# Altium PCB WikiTFT-2.0.PcbDoc
Units mil, origin at the board's own origin, x right, y up, seen from the top; angles counter-clockwise.
Board outline 1975 x 1975 mil, 2 copper layers (Top Layer, Bottom Layer); 8 components, 28 nets, 126 pads, 69 vias.
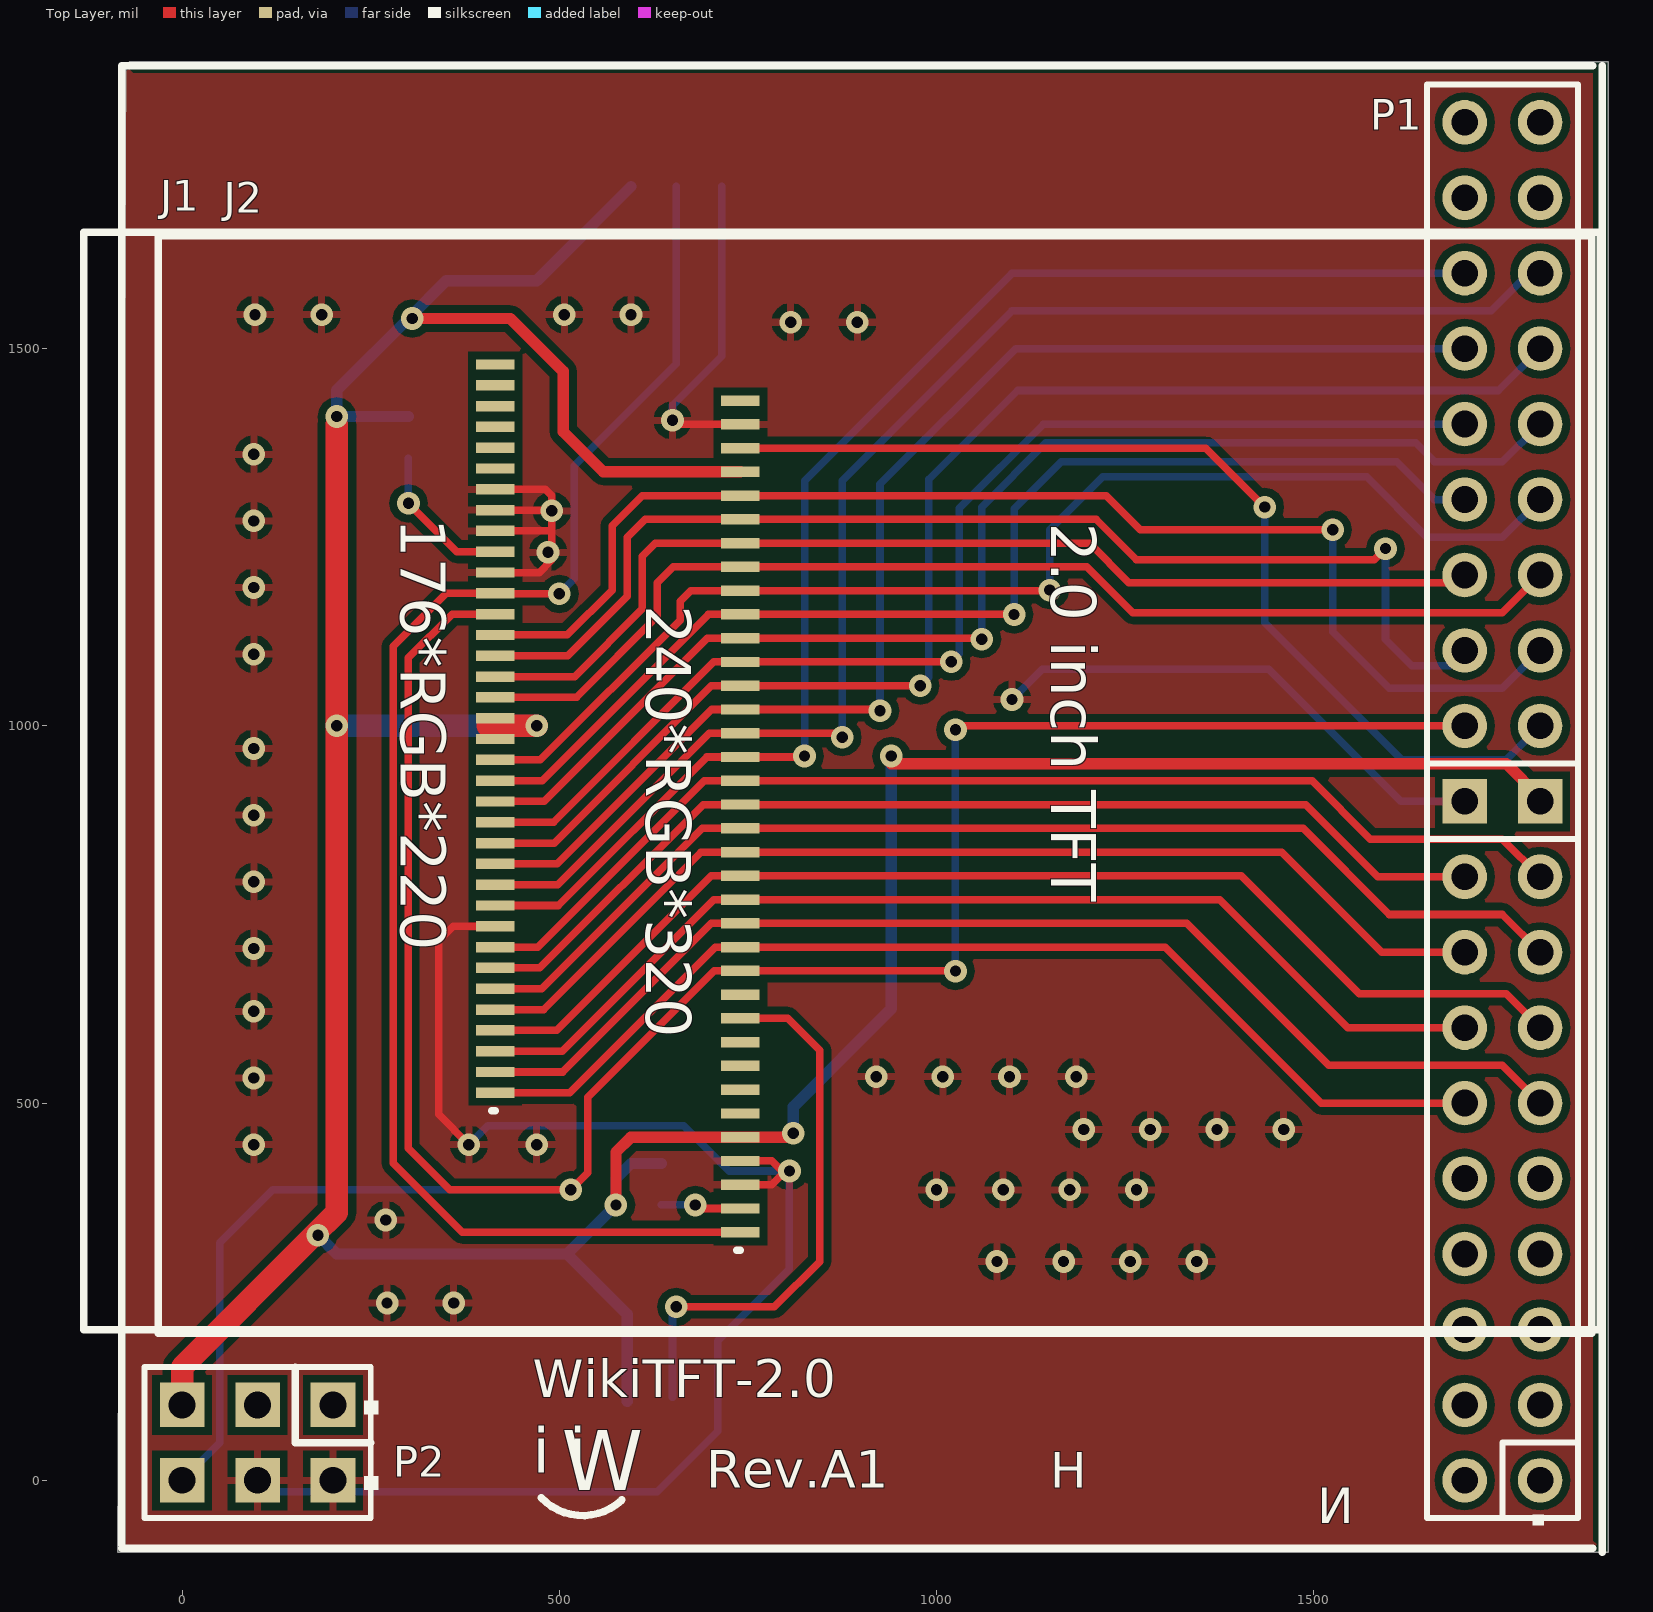
[diagram p0: Top Layer view]
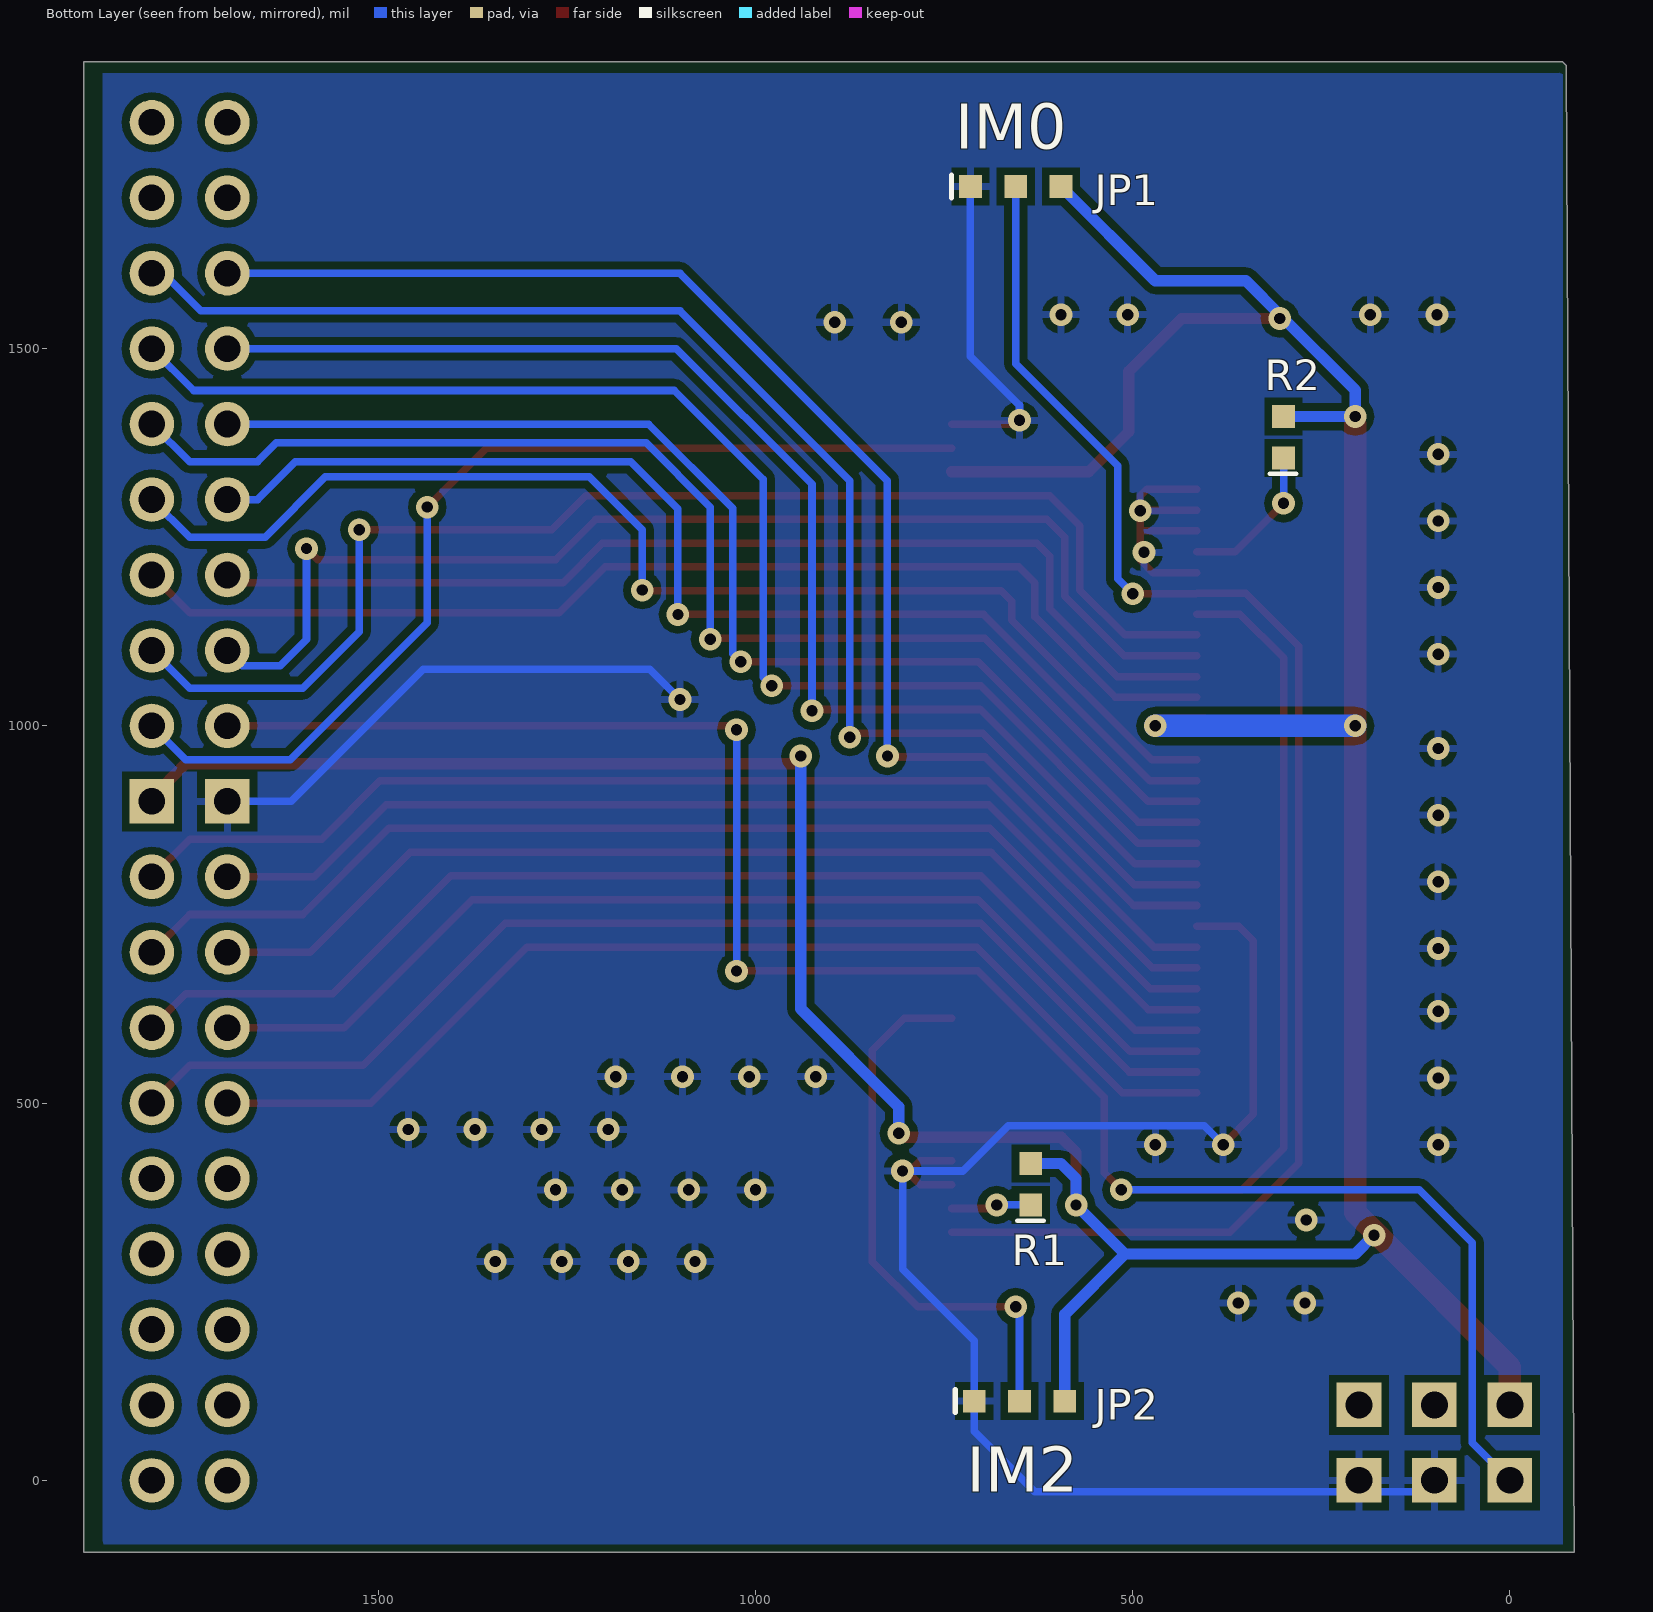
[diagram p1: Bottom Layer view, seen from below]

## Layer stack, top to bottom
Top Solder: solder mask 0.4, Solder Resist, Dk 3.5
Top Layer: signal copper 1.4
Dielectric 1: dielectric 12.6, FR-4, Dk 4.8
Bottom Layer: signal copper 1.4
Bottom Solder: solder mask 0.4, Solder Resist, Dk 3.5

## Board outline
-75,1875 -70,1880 1890,1880 1890,-95 -85,-95

## Design rules (kind name [scope] priority, off if disabled: settings)
Clearance [All] p1: gap=10
PolygonConnect [All] p1: connectstyle=Relief reliefconductorwidth=10 reliefentries=4 polygonreliefangle="90 Angle" airgapwidth=10
RoomDefinition WikiTFT-2.0 [InComponentClass('WikiTFT-2.0')] p1: confinementstyle=ConfineIn formatcopy=TRUE lockcomponents=FALSE outline -85,-95 1920,-95 1920,1890 -85,1890
RoutingVias [All] p1: holewidth=15 width=30 viastyle="Through Hole" minholewidth=10 minwidth=10 maxholewidth=30 maxwidth=50
SolderMaskExpansion [All] p1: expansion=4
UnpouredPolygon [All] p1: allowunpoured=FALSE
Width [All] p1: maxlimit=30 minlimit=10 preferedwidth=10
29 further rules are at their usual default settings.

## Components (designator, comment, footprint, x,y, rotation, side; value= is the part's Value field where it differs from the comment)
J1 "TFT-2.0-240x320-HX8367-A" TFT-2.0-HX8637 740,880 r270 top
J2 "TFT-2.0-178x220-LGDP4525" TFT-2.0-LGDP4525 415,420 r270 top
JP1 "Jumper3" JUMPER3_SMD 685,1715 r180 bottom
JP2 "Jumper3" JUMPER3_SMD 680,105 r180 bottom
P1 "WIKIGPIO-FULL" WIKIGPIO-FULL 1800,0 r90 top
P2 "WIKIPWR" WIKIPWR 200,100 r180 top
R1 "NA" 0603M 635,365 r90 bottom
R2 "NA" 0603M 300,1355 r90 bottom

## Footprints (in the part's own frame and the unit in brackets; to place one, negate y for a bottom-side part, rotate by r counter-clockwise, add the part's x,y. Pads: shape width x height; smd on the part's side, far side on the other; paste and mask are expansions set on the pad)
0603M [mil]
  rect 30x30 smd: 1(0,0) 2(55,0)
  silkscreen extent -21,-17 -21,18, body extent -5,-15 60,15, height 43
JUMPER3_SMD [mil]
  rect 30x30 smd: 1(-30,0) 2(30,0) 3(90,0)
  silkscreen extent -55,-15 -55,15
TFT-2.0-HX8637 [mm]
  rect 0.35x1.3 smd: 1(14,0) 2(13.2,0) 3(12.4,0) 4(11.6,0) 5(10.8,0) 6(10,0) 7(9.2,0) 8(8.4,0) 9(7.6,0) 10(6.8,0) 11(6,0) 12(5.2,0) 13(4.4,0) 14(3.6,0) 15(2.8,0) 16(2,0) 17(1.2,0) 18(0.4,0) 19(-0.4,0) 20(-1.2,0) 21(-2,0) 22(-2.8,0) 23(-3.6,0) 24(-4.4,0) 25(-5.2,0) 26(-6,0) 27(-6.8,0) 28(-7.6,0) 29(-8.4,0) 30(-9.2,0) 31(-10,0) 32(-10.8,0) 33(-11.6,0) 34(-12.4,0) 35(-13.2,0) 36(-14,0)
  silkscreen extent -19.56,-19.6 17.4,28.66
TFT-2.0-LGDP4525 [mm]
  rect 0.35x1.3 smd: 1(-2.38,0.004) 2(-3.08,0.004) 3(-3.781,0.004) 4(-4.481,0.004) 5(-5.182,0.004) 6(-5.883,0.004) 7(-6.583,0.004) 8(-7.284,0.004) 9(-7.984,0.004) 10(-8.685,0.004) 11(-9.385,0.004) 12(-10.086,0.004) 13(-10.787,0.004) 14(-11.487,0.004) 15(-12.188,0.004) 16(-12.888,0.004) 17(-13.589,0.004) 18(-14.29,0.004) 19(-14.99,0.004) 20(-15.691,0.004) 21(-16.391,0.004) 22(-17.092,0.004) 23(-17.792,0.004) 24(-18.493,0.004) 25(-19.194,0.004) 26(-19.894,0.004) 27(-20.595,0.004) 28(-21.295,0.004) 29(-21.996,0.004) 30(-22.697,0.004) 31(-23.397,0.004) 32(-24.098,0.004) 33(-24.798,0.004) 34(-25.499,0.004) 35(-26.199,0.004) 36(-26.9,0.004)
  silkscreen extent -31.35,-13.85 5.61,37.21
WIKIGPIO-FULL [mm] "Connector; Header; 19x2 Position"
  round 1.5 hole 0.9: 1(0,0) 2(0,2.54) 3(2.54,0) 4(2.54,2.54) 5(5.08,0) 6(5.08,2.54) 7(7.62,0) 8(7.62,2.54) 9(10.16,0) 10(10.16,2.54) 11(12.7,0) 12(12.7,2.54) 13(15.24,0) 14(15.24,2.54) 15(17.78,0) 16(17.78,2.54) 17(20.32,0) 18(20.32,2.54) 21(25.4,0) 22(25.4,2.54) 23(27.94,0) 24(27.94,2.54) 25(30.48,0) 26(30.48,2.54) 27(33.02,0) 28(33.02,2.54) 29(35.56,0) 30(35.56,2.54) 31(38.1,0) 32(38.1,2.54) 33(40.64,0) 34(40.64,2.54) 35(43.18,0) 36(43.18,2.54) 37(45.72,0) 38(45.72,2.54)
  rect 1.5x1.5 hole 0.9: 19(22.86,0) 20(22.86,2.54)
  silkscreen extent -1.52,-1.27 46.99,3.81
WIKIPWR [mm] "Connector; Header; 3x2 Position"
  rect 1.5x1.5 hole 0.9: 1(0,0) 2(0,2.54) 3(2.54,0) 4(2.54,2.54) 5(5.08,0) 6(5.08,2.54)
  silkscreen extent -1.52,-1.27 6.35,3.81

## Part data
J2: "LGDP4525-178x220"
P1: "Header, 19-Pin, Dual row"
P2: "PWR HDR"
R1 R2: library part Res, "Resistor"

## Via types
v1: diameter 30, hole 15, Top Layer to Bottom Layer, 69 vias

## Nets (pads, with @x,y where several pads share a name; then routed paths per layer and width w, separated by ;. In a path a pad name is that pad's centre, name@x,y a point inside that pad or via, vN(x,y) a via of type N, cw(c..) or ccw(c..) an arc to the next point about the centre after c; other vN are vias at no path point)
GND: J1.3 J1.4 J1.35 J2.9 J2.26 J2.28 J2.29 J2.30 JP1.1 JP2.1 P1.20 P2.2 P2.4 | length 3526.1
  Top Layer w10: v1(380,445) 340,485 340,715 359.34,734.34 J2.9 ; J2.26 473.24,1203.24 490,1220 490,1260 ; J2.28 488.4,1258.4 490,1260 ; J2.29 v1@490,1285.98 ; J2.30 481.44,1313.56 490,1305 v1@490,1285.98 ; v1(650,1405) 655.32,1399.68 J1.35 ; J1.3 781.81,391.81 v1@797.5,407.5 ; J1.4 781.69,423.31 v1@797.5,407.5 ; v1(805,410) 805,400 v1@797.5,407.5 ; 490,1260 v1@490,1285.98
  Bottom Layer w10: P2.4 115,-15 630,-15 710,65 JP2.1 710,185 805,280 v1(805,410) 725,410 665,470 405,470 v1(380,445) ; v1(650,1405) 650,1425 715,1490 JP1.1 ; v1(1100,1035) 1140,1075 1440,1075 1615,900 P1.20
  other v1: 271.67,235 360,235 1080,290 1168.33,290 1256.67,290 1345,290 270,345 1000,385 1088.33,385 1176.67,385 1265,385 95,445 470,445 1195,465 1283.33,465 1371.67,465 1460,465 95,533.33 920,535 1008.33,535 1096.67,535 1185,535 95,621.67 95,705 95,793.33 95,881.67 95,970 95,1095 95,1183.33 485,1230 95,1271.67 490,1285 95,1360 806.67,1535 895,1535 96.67,1545 185,1545 506.67,1545 595,1545
IM0: J1.1 J2.25 JP1.2 | length 2036.9
  Top Layer w10: v1(500,1175) 415.79,1175 J2.25 350,1175.65 280,1105.65 280,420 371.18,328.82 J1.1
  Bottom Layer w10: v1(500,1175) 520,1195 520,1345 655,1480 JP1.2
IM2: J1.10 JP2.2 | length 739.4
  Top Layer w10: v1(655,230) 785,230 845,290 845,570 802.72,612.28 J1.10
  Bottom Layer w10: JP2.2@650,110 650,225 v1(655,230)
NetJ1_2: J1.2 R1.1 | length 106.9
  Top Layer w10: v1(680.32,365) 685,360.32 J1.2
  Bottom Layer w10: R1.1 v1(680.32,365)
NetJ2_27: J2.27 R2.1 | length 201.7
  Top Layer w10: v1(300,1295) 364.18,1230.82 J2.27
  Bottom Layer w10: v1(300,1295) R2.1
PDVDD: J1.5 J1.33 J2.18 J2.19 JP1.3 JP2.3 P1.19 P2.5 R1.2 R2.2 | length 5447.9
  Top Layer w15: v1@175,325 v1(180,325) ; v1(305,1540) 435,1540 505,1470 505,1390 558.31,1336.69 J1.33 ; v1(575,365) 575,435 594.8,454.8 J1.5 804.8,454.8 v1(810,460) ; v1(940,960) 940,950 1755,950 1800,905 P1.19
  Top Layer w30: P2.5 0,150 175,325 205,355 v1(205,1000) v1@205,1400 ; 405,1000 v1(470,1000)
  Bottom Layer w15: v1(180,325) 205,300 510,300 ; R2.2 v1(205,1410) 205,1445 v1@302.5,1542.5 ; v1(305,1540) v1@302.5,1542.5 ; JP2.3 590,220 510,300 ; JP1.3 470,1590 350,1590 v1@302.5,1542.5 ; R1.2 595,420 575,400 v1(575,365) 510,300 ; v1(810,460) 810,495 940,625 v1(940,960)
  Bottom Layer w30: v1(205,1000) v1(470,1000)
TFT_CS: J1.32 J2.23 P1.23 | length 1740.8
  Top Layer w10: J2.23 510.49,1120.49 570,1180 570,1265 610.2,1305.2 J1.32 1224.8,1305.2 1270,1260 1515,1260 1525,1270 v1(1525,1260)
  Bottom Layer w10: v1@1525,1270 1525,1125 1600,1050 1750,1050 P1.23
TFT_DA00: J1.20 J2.8 P1.17 | length 1528.9
  Top Layer w10: J2.8 471.61,706.76 692.1,927.24 J1.20 1497.76,927.24 1575,850 1750,850 P1.17
TFT_DA01: J1.19 J2.7 P1.18 | length 1414.2
  Top Layer w10: J2.7 474.18,679.18 690.75,895.75 J1.19 1489.25,895.75 1585,800 P1.18
TFT_DA02: J1.18 J2.6 P1.15 | length 1541
  Top Layer w10: J2.6 476.6,651.6 689.25,864.25 J1.18 1485.75,864.25 1600,750 1750,750 P1.15
TFT_DA03: J1.17 J2.5 P1.16 | length 1426.3
  Top Layer w10: J2.5 479.01,624.01 687.76,832.76 J1.17 1457.24,832.76 1590,700 P1.16
TFT_DA04: J1.16 J2.4 P1.13 | length 1553.1
  Top Layer w10: J2.4 496.43,596.43 701.26,801.26 J1.16 1403.74,801.26 1560,645 1755,645 P1.13
TFT_DA05: J1.15 J2.3 P1.14 | length 1438.4
  Top Layer w10: J2.3 503.85,568.85 704.76,769.76 J1.15 1375.24,769.76 1545,600 P1.14
TFT_DA06: J1.14 J2.2 P1.11 | length 1565.2
  Top Layer w10: J2.2 504.55,541.27 701.55,738.27 J1.14 1331.73,738.27 1520,550 1750,550 P1.11
TFT_DA07: J1.13 J2.1 P1.12 | length 1450.5
  Top Layer w10: J2.1 513.69,513.69 706.77,706.77 J1.13 1303.23,706.77 1510,500 P1.12
TFT_DB00: J1.28 J2.17 P1.27 | length 1655.5
  Top Layer w10: J2.17 475,955 660,1140 660,1165 674.21,1179.21 J1.28 1149.21,1179.21 v1(1150,1180)
  Bottom Layer w10: v1(1150,1180) 1150,1260 1220,1330 1570,1330 1650,1250 1750,1250 P1.27
TFT_DB01: J1.27 J2.16 P1.28 | length 1562.6
  Top Layer w10: J2.16 477.42,927.42 697.72,1147.72 J1.27 v1(1102.72,1147.72)
  Bottom Layer w10: v1(1102.72,1147.72) 1102.72,1287.72 1165,1350 1610,1350 1660,1300 P1.28
TFT_DB02: J1.26 J2.15 P1.29 | length 1716.3
  Top Layer w10: J2.15 479.83,899.83 696.22,1116.22 J1.26 1058.78,1116.22 v1(1060,1115)
  Bottom Layer w10: v1(1060,1115) 1060,1290 1145,1375 1635,1375 1660,1350 1750,1350 P1.29
TFT_DB03: J1.25 J2.14 P1.30 | length 1616.9
  Top Layer w10: J2.14 492.25,872.25 704.72,1084.72 J1.25 1019.72,1084.72 v1(1019.45,1085)
  Bottom Layer w10: v1(1019.45,1085) 1030,1095.55 1030,1288.28 1141.72,1400 P1.30
TFT_DB04: J1.24 J2.13 P1.31 | length 1809.9
  Top Layer w10: J2.13 492.95,844.67 701.51,1053.23 J1.24 v1(978.23,1053.23)
  Bottom Layer w10: v1(978.23,1053.23) 989.45,1064.45 989.45,1326.57 1107.41,1444.53 1744.53,1444.53 P1.31
TFT_DB05: J1.23 J2.12 P1.32 | length 1744.9
  Top Layer w10: J2.12 497.09,817.09 701.73,1021.73 J1.23 923.27,1021.73 v1(925,1020)
  Bottom Layer w10: v1(925,1020) 925,1320 1105,1500 P1.32
TFT_DB06: J1.22 J2.11 P1.33 | length 1924.1
  Top Layer w10: J2.11 497.79,789.51 698.52,990.24 J1.22 869.76,990.24 v1(875,985)
  Bottom Layer w10: v1(875,985) 875,1325 1100,1550 1735,1550 1785,1600 P1.33
TFT_DB07: J1.21 J2.10 P1.34 | length 1845.8
  Top Layer w10: J2.10 498.49,761.92 695.31,958.74 J1.21 823.74,958.74 v1(825,960)
  Bottom Layer w10: v1(825,960) 825,1325 1100,1600 P1.34
TFT_DC/SCL: J1.31 J2.22 P1.24 | length 1576.8
  Top Layer w10: J2.22 511.19,1092.91 590,1171.72 590,1250 613.7,1273.7 J1.31 1211.3,1273.7 1265,1220 1580,1220 v1(1595,1235)
  Bottom Layer w10: v1(1595,1235) 1595,1115 1630,1080 1680,1080 P1.24
TFT_RD: J1.29 J2.20 P1.25 | length 1528.7
  Top Layer w10: J2.20 522.74,1037.74 630,1145 630,1190 650.71,1210.71 J1.29 1199.29,1210.71 1260,1150 1750,1150 P1.25
TFT_RST: J1.12 J2.24 P1.22 P2.6 | length 3542.7
  Top Layer w10: J2.24 358.07,1148.07 300,1090 300,440 355,385 v1(515,385) 537.5,407.5 537.5,507.5 705.28,675.28 J1.12 1024.72,675.28 v1(1025,675) ; v1(1025,995) 1030,1000 P1.22
  Bottom Layer w10: P2.6 50,50 50,315 120,385 v1(515,385) ; v1(1025,675) v1(1025,995)
TFT_SDI: J1.34 P1.21 | length 1339.6
  Top Layer w10: J1.34 1356.81,1368.19 v1(1435,1290)
  Bottom Layer w10: v1(1435,1290) 1435,1136.72 1616.72,955 1755,955 P1.21
TFT_WR/SCL: J1.30 J2.21 P1.26 | length 1424.9
  Top Layer w10: J2.21 520.33,1065.33 610,1155 610,1225 627.2,1242.2 J1.30 1202.8,1242.2 1255,1190 1690,1190 P1.26
pads on no net: J1.6 J1.7 J1.8 J1.9 J1.11 J1.36 J2.31 J2.32 J2.33 J2.34 J2.35 J2.36 P1.1 P1.2 P1.3 P1.4 P1.5 P1.6 P1.7 P1.8 P1.9 P1.10 P1.35 P1.36 P1.37 P1.38 P2.1 P2.3

## Polygon pours and split planes (outlines as drawn)
GND on Top Layer "Top Layer-No Net" (solid, remove dead copper, pour order 2): -75,1875 -65,1865 1870,1865 1870,-80 1875,-85 1870,-90 -75,-90
GND on Bottom Layer "Top Layer-No Net" (solid, remove dead copper, pour order 4): -70,1870 -65,1865 1865,1865 1865,-80 1870,-85 -70,-85

## Silkscreen, mask and mechanical layers (free items; w line width, h text height)
Top Overlay:
  lines w10: -80,-90 1870,-90 ; -80,-85 -80,1875 1870,1875 ; 476,-23 ccw(c531,29) 583,-26 ; 1882.52,-95 1882.52,1875
  text "WikiTFT-2.0" at 465,110 h50
  text "i i" at 465,10 h60
  text "Rev.A1" at 695,-10 h50
  text "W" at 503,-13 h80
  text "H" at 1151,-25 h80
  text "N" at 1553,-72 h80
Bottom Overlay:
  text "IM0" at 735,1765 h60
  text "IM2" at 720,-15 h60

## Text inside footprints (layer, text, board x,y; h text height)
J1: Top Overlay "240*RGB*320" at 615,1160 h60 r270
J2: Top Overlay "2.0 inch TFT" at 1151.67,1269.31 h60 r270; Top Overlay "176*RGB*220" at 290,1275 h60 r270